# EAGLE board CrossBoard v1 (EAGLE 6.1)

Size 120.63 x 100 mm. Coordinates in mm from the lower left corner, seen from the top.
Outline: 0,0 120.63,0 120.63,100 0,100 0,0
Copper layers (1*16): Top 0.035mm / dielectric 1.5mm / Bottom 0.035mm
Design rules: minimum track width 10mil, minimum drill 24mil, track to track 8mil, track to pad 8mil, pad to pad 8mil, via to via 8mil, smd to smd 8mil, copper to edge 40mil, drill to drill 8mil, minimum pad ring 10mil, minimum via ring 8mil, stop-mask expansion 4mil, vias tented up to drill 0mil, thermal gap 10mil

## Footprints (pad centres in the part's own frame; a part is rotated, then mirrored left to right if it is on the bottom)
*HPBFP = drill 1.1 pad 1.93: P$1 46.99,22.86; P$2 44.45,22.86; P$3 41.91,22.86; P$4 39.37,22.86; P$5 36.83,22.86; P$6 34.29,22.86; P$7 31.75,22.86; P$8 29.21,22.86; P$9 26.67,22.86; P$10 24.13,22.86; P$11 21.59,22.86; P$12 1.27,22.86; P$13 -1.27,22.86; P$14 -3.81,22.86; P$15 -6.35,22.86; P$16 -8.89,22.86; P$17 -11.43,22.86; P$18 -13.97,22.86; P$19 -16.51,22.86; P$20 -19.05,22.86; P$21 -21.59,22.86; P$22 -24.13,22.86; P$23 19.05,22.86; P$24 16.51,22.86; P$25 13.97,22.86; P$26 11.43,22.86; P$27 8.89,22.86; P$28 6.35,22.86; P$29 -26.67,22.86; P$30 -29.21,22.86; P$31 -31.75,22.86; P$32 -34.29,22.86; P$33 -36.83,22.86; P$34 -39.37,22.86; P$35 46.99,25.4; P$36 44.45,25.4; P$37 41.91,25.4; P$38 39.37,25.4; P$39 36.83,25.4; P$40 34.29,25.4; P$41 31.75,25.4; P$42 29.21,25.4; P$43 26.67,25.4; P$44 24.13,25.4; P$45 21.59,25.4; P$46 1.27,25.4; P$47 -1.27,25.4; P$48 -3.81,25.4; P$49 -6.35,25.4; P$50 -8.89,25.4; P$51 -11.43,25.4; P$52 -13.97,25.4; P$53 -16.51,25.4; P$54 -19.05,25.4; P$55 -21.59,25.4; P$56 -24.13,25.4; P$57 19.05,25.4; P$58 16.51,25.4; P$59 13.97,25.4; P$60 11.43,25.4; P$61 8.89,25.4; P$62 6.35,25.4; P$63 -26.67,25.4; P$64 -29.21,25.4; P$65 -31.75,25.4; P$66 -34.29,25.4; P$67 -36.83,25.4; P$68 -39.37,25.4; P$69 46.99,27.94; P$70 44.45,27.94; P$71 41.91,27.94; P$72 39.37,27.94; P$73 36.83,27.94; P$74 34.29,27.94; P$75 31.75,27.94; P$76 29.21,27.94; P$77 26.67,27.94; P$78 24.13,27.94; P$79 21.59,27.94; P$80 1.27,27.94; P$81 -1.27,27.94; P$82 -3.81,27.94; P$83 -6.35,27.94; P$84 -8.89,27.94; P$85 -11.43,27.94; P$86 -13.97,27.94; P$87 -16.51,27.94; P$88 -19.05,27.94; P$89 -21.59,27.94; P$90 -24.13,27.94; P$91 19.05,27.94; P$92 16.51,27.94; P$93 13.97,27.94; P$94 11.43,27.94; P$95 8.89,27.94; P$96 6.35,27.94; P$97 -26.67,27.94; P$98 -29.21,27.94; P$99 -31.75,27.94; P$100 -34.29,27.94; P$101 -36.83,27.94; P$102 -39.37,27.94; P$103 41.91,-25.4; P$104 39.37,-25.4; P$105 36.83,-25.4; P$106 34.29,-25.4; P$107 31.75,-25.4; P$108 29.21,-25.4; P$109 26.67,-25.4; P$110 24.13,-25.4; P$111 21.59,-25.4; P$112 19.05,-25.4; P$113 16.51,-25.4; P$114 -3.81,-25.4; P$115 -6.35,-25.4; P$116 -8.89,-25.4; P$117 -11.43,-25.4; P$118 -13.97,-25.4; P$119 -16.51,-25.4; P$120 -19.05,-25.4; P$121 -21.59,-25.4; P$122 -24.13,-25.4; P$123 -26.67,-25.4; P$124 -29.21,-25.4; P$125 13.97,-25.4; P$126 11.43,-25.4; P$127 8.89,-25.4; P$128 6.35,-25.4; P$129 3.81,-25.4; P$130 -1.27,-25.4; P$131 -31.75,-25.4; P$132 -34.29,-25.4; P$133 -36.83,-25.4; P$134 -39.37,-25.4; P$135 41.91,-27.94; P$136 39.37,-27.94; P$137 36.83,-27.94; P$138 34.29,-27.94; P$139 31.75,-27.94; P$140 29.21,-27.94; P$141 26.67,-27.94; P$142 24.13,-27.94; P$143 21.59,-27.94; P$144 19.05,-27.94; P$145 16.51,-27.94; P$146 -3.81,-27.94; P$147 -6.35,-27.94; P$148 -8.89,-27.94; P$149 -11.43,-27.94; P$150 -13.97,-27.94; P$151 -16.51,-27.94; P$152 -19.05,-27.94; P$153 -21.59,-27.94; P$154 -24.13,-27.94; P$155 -26.67,-27.94; P$156 -29.21,-27.94; P$157 13.97,-27.94; P$158 11.43,-27.94; P$159 8.89,-27.94; P$160 6.35,-27.94; P$161 3.81,-27.94; P$162 -1.27,-27.94; P$163 -31.75,-27.94; P$164 -34.29,-27.94; P$165 -36.83,-27.94; P$166 -39.37,-27.94; P$167 41.91,-30.48; P$168 39.37,-30.48; P$169 36.83,-30.48; P$170 34.29,-30.48; P$171 31.75,-30.48; P$172 29.21,-30.48; P$173 26.67,-30.48; P$174 24.13,-30.48; P$175 21.59,-30.48; P$176 19.05,-30.48; P$177 16.51,-30.48; P$178 -3.81,-30.48; P$179 -6.35,-30.48; P$180 -8.89,-30.48; P$181 -11.43,-30.48; P$182 -13.97,-30.48; P$183 -16.51,-30.48; P$184 -19.05,-30.48; P$185 -21.59,-30.48; P$186 -24.13,-30.48; P$187 -26.67,-30.48; P$188 -29.21,-30.48; P$189 13.97,-30.48; P$190 11.43,-30.48; P$191 8.89,-30.48; P$192 6.35,-30.48; P$193 3.81,-30.48; P$194 -1.27,-30.48; P$195 -31.75,-30.48; P$196 -34.29,-30.48; P$197 -36.83,-30.48; P$198 -39.37,-30.48
*LPBFP = drill 1.1 pad 1.93: P$1 -12.7,13.97; P$2 -10.16,13.97; P$3 -7.62,13.97; P$4 -12.7,16.51; P$5 -20.32,13.97; P$6 -17.78,13.97; P$7 -15.24,13.97; P$8 -10.16,16.51; P$9 -7.62,16.51; P$10 -12.7,19.05; P$11 -10.16,19.05; P$12 -7.62,19.05; P$13 -5.08,13.97; P$14 -2.54,13.97; P$15 0,13.97; P$16 -5.08,16.51; P$17 -2.54,16.51; P$18 0,16.51; P$19 -5.08,19.05; P$20 -2.54,19.05; P$21 0,19.05; P$22 2.54,13.97; P$23 5.08,13.97; P$24 7.62,13.97; P$25 2.54,16.51; P$26 5.08,16.51; P$27 7.62,16.51; P$28 2.54,19.05; P$29 5.08,19.05; P$30 7.62,19.05; P$31 10.16,13.97; P$32 12.7,13.97; P$33 15.24,13.97; P$34 10.16,16.51; P$35 12.7,16.51; P$36 15.24,16.51; P$37 10.16,19.05; P$38 12.7,19.05; P$39 -20.32,16.51; P$40 -17.78,16.51; P$41 -15.24,16.51; P$42 15.24,19.05; P$43 17.78,13.97; P$44 20.32,13.97; P$45 -20.32,-19.05; P$46 17.78,16.51; P$47 20.32,16.51; P$48 -17.78,-19.05; P$49 17.78,19.05; P$50 20.32,19.05; P$51 -15.24,-19.05; P$52 -12.7,-19.05; P$53 -10.16,-19.05; P$54 -7.62,-19.05; P$55 -5.08,-19.05; P$56 -2.54,-19.05; P$57 0,-19.05; P$58 2.54,-19.05; P$59 5.08,-19.05; P$60 7.62,-19.05; P$61 10.16,-19.05; P$62 12.7,-19.05; P$63 15.24,-19.05; P$64 17.78,-19.05; P$73 -20.32,19.05; P$74 -17.78,19.05; P$75 -15.24,19.05
*ETXFP = drill 0.8: 3.3V -0.237,-21.988; 5V -5.316,-21.988; A0 -11.448,18.396; A1 -13.245,16.6; A2 -15.04,14.804; A3 -16.837,13.008; A4 -22.225,2.54; A5 -22.225,0; A6 -15.04,-14.804; A7 -13.245,-16.6; BAT 4.843,-21.988; COM1_RX -0.236,21.988; COM1_TX 2.304,21.988; COM2_RX -22.225,-5.08; COM2_TX -22.225,-2.54; D0 -22.225,5.08; D1 -22.225,7.62; D2 -20.429,9.416; D3 -18.633,11.212; DAC1 -22.225,-7.62; DAC2 -20.429,-9.416; GND1 -11.448,-18.396; GND2 -9.652,-20.192; GND3 -7.856,-21.988; GND4 -2.776,-21.988; GND5 2.303,-21.988; MCO 4.844,21.988; T0 -2.776,21.988; T1 -5.316,21.988; T2 -7.856,21.988; T3 -9.652,20.192; TA0 -18.633,-11.212; TA1 -16.837,-13.008
DUEMILANOVE_VIAS = drill 1.016 pad 1.88: 3.3V 50.8,13.97; 5V 50.8,16.51; A0 50.8,29.21; A1 50.8,31.75; A2 50.8,34.29; A3 50.8,36.83; A4 50.8,39.37; A5 50.8,41.91; AREF 2.54,2.54; D2 2.54,36.83; D3 2.54,34.29; D4 2.54,31.75; D5 2.54,29.21; D6 2.54,26.67; D7 2.54,24.13; D8 2.54,20.32; D9 2.54,17.78; D10 2.54,15.24; D11 2.54,12.7; D12 2.54,10.16; D13 2.54,7.62; GND@0 50.8,19.05; GND@1 50.8,21.59; GND@2 2.54,5.08; RES 50.8,11.43; RX 2.54,41.91; TX 2.54,39.37; VIN 50.8,24.13

## Placement (x,y rotation side)
FP1  HPBFPNORM  [*HPBFP]  48.26,39.37 0 top
FP2  LPBFPNORM  [*LPBFP]  33.02,39.37 0 top
FP3  ETXFPT  [*ETXFP]  68.58,38.1 180 top
U1  ARDUINO_SHIELDNO_SILK  [DUEMILANOVE_VIAS]  6.35,15.24 0 top

## Library data of the parts
FP1-FP3 = Pygmy
U1 = SparkFun